# Altium PCB balance.PcbDoc
Units mm, origin at the board's own origin, x right, y up, seen from the top; angles counter-clockwise.
Board outline 25.91 x 66.29 mm, 2 copper layers (Top Layer, Bottom Layer); 61 components, 31 nets, 187 pads, 57 vias.
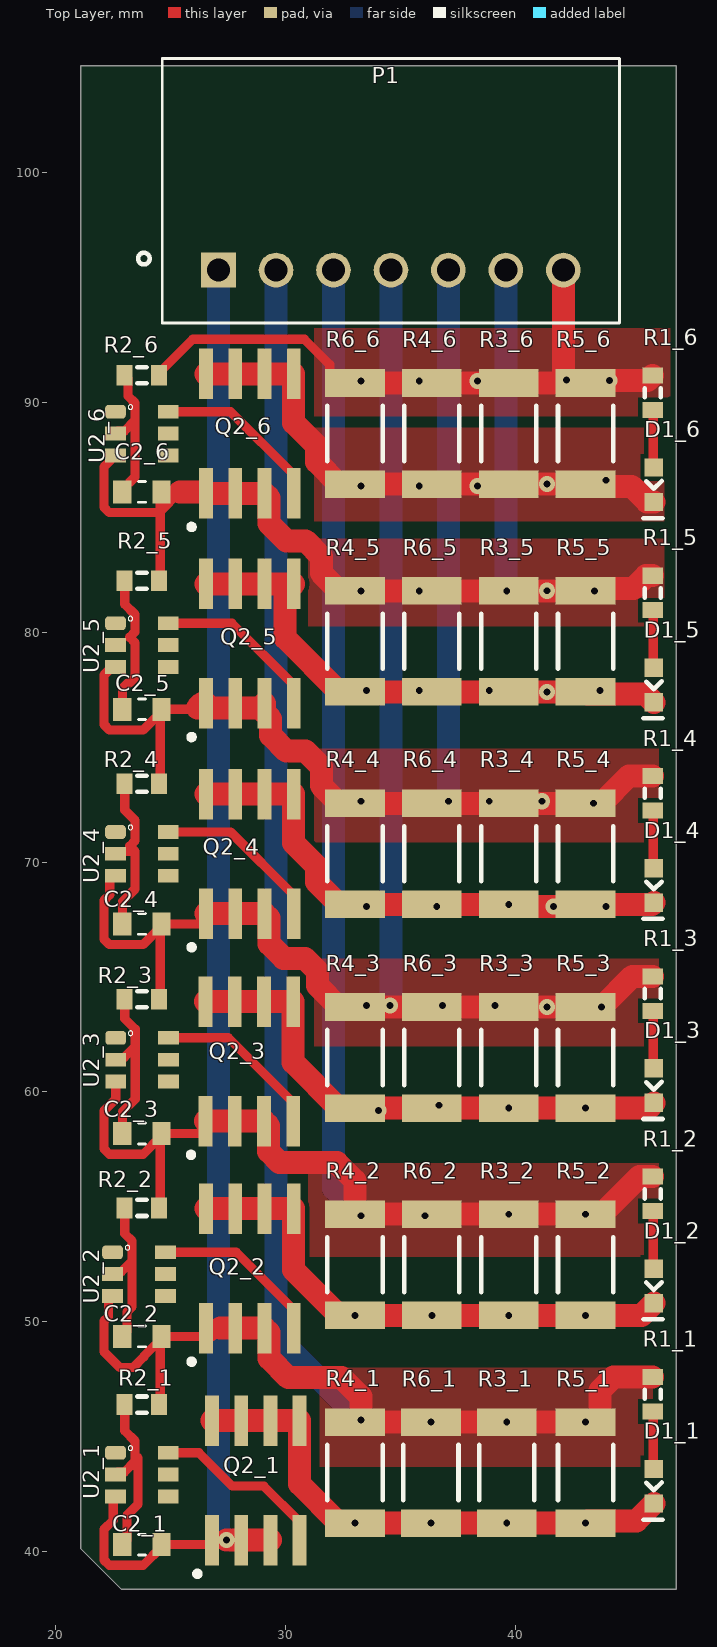
[diagram p0: Top Layer view]
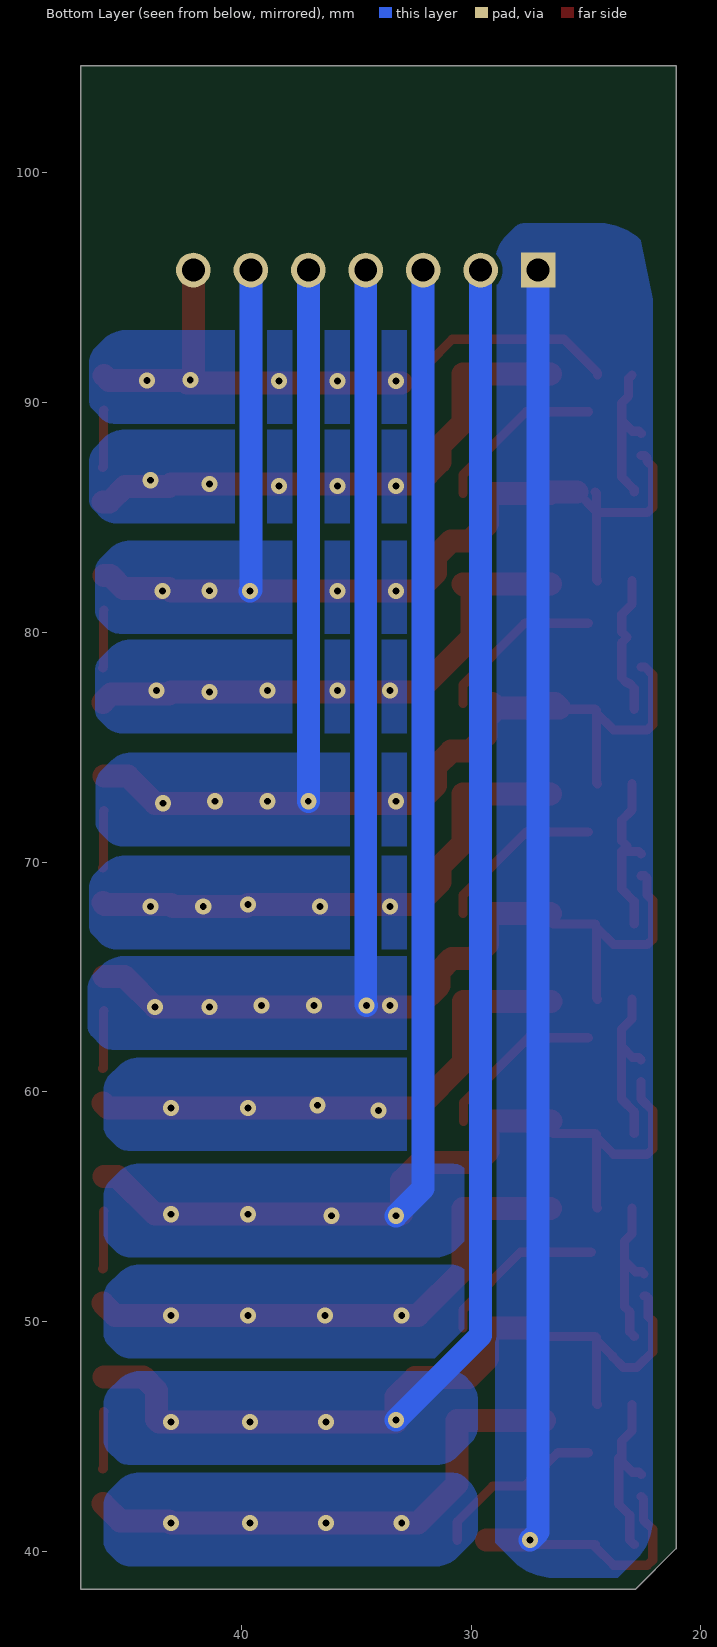
[diagram p1: Bottom Layer view, seen from below]

## Layer stack, top to bottom
Top Solder: solder mask 0.0102, Solder Resist, Dk 3.5
Top Layer: signal copper 0.0356
Dielectric 1: dielectric 0.32, FR-4, Dk 4.8
Bottom Layer: signal copper 0.0356
Bottom Solder: solder mask 0.0102, Solder Resist, Dk 3.5

## Board outline
21.082,40.132 21.082,104.648 46.99,104.648 46.99,38.354 22.86,38.354

## Design rules (kind name [scope] priority, off if disabled: settings)
Clearance [All] p1: gap=0.2 ignorepadtopadclearanceinfootprint=FALSE except(0: Arc-Hole Track-Hole SMDPad-Hole THPad-Hole Via-Hole Fill-Hole Poly-Hole Region-Hole Text-Hole)
ComponentClearance [All] p1: gap=0.254 collisioncheckmode=3 verticalgap=2540 showdistances=FALSE
FanoutControl Fanout_SOIC [IsSOIC] p3: bgadir=Out bgaviamode=Closest fanoutstyle=Auto fanoutdirection=Alternating viagrid=0.025 // Fanout_SOIC (Default Rule)
FanoutControl Fanout_Small [(CompPinCount < 5)] p4: bgadir=Out bgaviamode=Closest fanoutstyle=Auto fanoutdirection=OutThenIn viagrid=0.025 // Fanout_Small (Default Rule)
FanoutControl Fanout_Default [All] p5: bgadir=In bgaviamode=Closest fanoutstyle=Auto fanoutdirection=Alternating viagrid=0.025 // Fanout_Default (Default Rule)
HoleSize [All] p1: absolutevalues=TRUE maxlimit=4.5 minlimit=0.3 maxpercent=80.000 minpercent=20.000
HoleToHoleClearance [All] p1: gap=0.4 allowstackedmicrovias=TRUE
MinimumSolderMaskSliver [All] p1: minsoldermaskwidth=0.2
PlaneClearance [All] p1: clearance=0.2
PlaneConnect [All] p1: planeconnectstyle=Direct reliefexpansion=0.5 reliefentries=4 reliefconductorwidth=0.25 reliefairgap=0.25
PolygonConnect [All] p1: connectstyle=Direct reliefconductorwidth=0.3 reliefentries=4 polygonreliefangle="90 Angle" airgapwidth=0.254
RoomDefinition 1 [InComponentClass('1')] p1: confinementstyle=ConfineIn formatcopy=TRUE lockcomponents=FALSE outline 21.336,38.608 47.498,38.608 47.498,48.514 21.336,48.514
RoomDefinition 6 [InComponentClass('6')] p2: confinementstyle=ConfineIn formatcopy=TRUE lockcomponents=FALSE outline 21.17,84.074 47.078,84.074 47.078,92.71 21.17,92.71
RoomDefinition 3 [InComponentClass('3')] p3: confinementstyle=ConfineIn formatcopy=TRUE lockcomponents=FALSE outline 21.313,56.752 46.967,56.752 46.967,65.81 21.313,65.81
RoomDefinition 5 [InComponentClass('5')] p4: confinementstyle=ConfineIn formatcopy=TRUE lockcomponents=FALSE outline 21.209,74.93 47.117,74.93 47.117,84.014 21.209,84.014
RoomDefinition 4 [InComponentClass('4')] p5: confinementstyle=ConfineIn formatcopy=TRUE lockcomponents=FALSE outline 21.336,65.786 46.99,65.786 46.99,74.93 21.336,74.93
RoomDefinition 2 [InComponentClass('2')] p6: confinementstyle=ConfineIn formatcopy=TRUE lockcomponents=FALSE outline 21.336,47.752 47.498,47.752 47.498,56.896 21.336,56.896
RoutingCorners [All] p1: cornerstyle=45-Degree minsetback=2.5 maxsetback=2.5
RoutingPriority [All] p1 off: routingpriority=0
RoutingVias [All] p1: holewidth=0.3 width=0.7 viastyle="Through Hole" minholewidth=0.3 minwidth=0.7 maxholewidth=0.8 maxwidth=1.2
SilkToSilkClearance [All] p1: silktosilkclearance=0.2
SilkToSolderMaskClearance SilkscreenOverComponentPads [IsPad] p1: minsilkscreentomaskgap=0.2 clearancetoexposedcopper=TRUE
SolderMaskExpansion [All] p1: expansion=0.1 istentingtop=FALSE
Width [All] p1: maxlimit=5 minlimit=0.15 preferedwidth=0.3 minimp=50.000000 maximp=50.000000 favimp=50.000000
17 further rules are at their usual default settings.

## Classes and differential pairs
channel class 1s: 1 2 3 4 5 6
component class 6: C2_6 D1_6 Q2_6 R1_6 R2_6 R3_6 R4_6 R5_6 R6_6 U2_6
component class 5: C2_5 D1_5 Q2_5 R1_5 R2_5 R3_5 R4_5 R5_5 R6_5 U2_5
component class 4: C2_4 D1_4 Q2_4 R1_4 R2_4 R3_4 R4_4 R5_4 R6_4 U2_4
component class 3: C2_3 D1_3 Q2_3 R1_3 R2_3 R3_3 R4_3 R5_3 R6_3 U2_3
component class 2: C2_2 D1_2 Q2_2 R1_2 R2_2 R3_2 R4_2 R5_2 R6_2 U2_2
component class 1: C2_1 D1_1 Q2_1 R1_1 R2_1 R3_1 R4_1 R5_1 R6_1 U2_1
component class Sheet2: P1

## Components (designator, comment, footprint, x,y, rotation, side; value= is the part's Value field where it differs from the comment)
C2_1 "GX035C104MAT2-500" *CAPC1608X90 23.749,40.3 r0 top value=0.1u (schematic designator C2)
C2_2 "GX035C104MAT2-500" *CAPC1608X90 23.749,49.362 r0 top value=0.1u (schematic designator C2)
C2_3 "GX035C104MAT2-500" *CAPC1608X90 23.749,58.19 r0 top value=0.1u (schematic designator C2)
C2_4 "GX035C104MAT2-500" *CAPC1608X90 23.749,67.31 r0 top value=0.1u (schematic designator C2)
C2_5 "GX035C104MAT2-500" *CAPC1608X90 23.749,76.648 r0 top value=0.1u (schematic designator C2)
C2_6 "GX035C104MAT2-500" *CAPC1608X90 23.749,86.106 r0 top value=0.1u (schematic designator C2)
D1_1 "0603-LED-BLUE" *LEDM1608X80_LTE-C1906R-14(Primary) 46.024,42.84 r90 top (schematic designator D1)
D1_2 "0603-LED-BLUE" *LEDM1608X80_LTE-C1906R-14(Primary) 46.024,51.555 r90 top (schematic designator D1)
D1_3 "0603-LED-BLUE" *LEDM1608X80_LTE-C1906R-14(Primary) 46.024,60.271 r90 top (schematic designator D1)
D1_4 "0603-LED-BLUE" *LEDM1608X80_LTE-C1906R-14(Primary) 46.024,68.986 r90 top (schematic designator D1)
D1_5 "0603-LED-BLUE" *LEDM1608X80_LTE-C1906R-14(Primary) 46.024,77.701 r90 top (schematic designator D1)
D1_6 "0603-LED-BLUE" *LEDM1608X80_LTE-C1906R-14(Primary) 46.024,86.416 r90 top (schematic designator D1)
P1 "S7B-XH-A(LF)(SN)" *JST_S7B-XH-A(LF)(SN) 30.834,95.758 r0 top
Q2_1 "IRF7862" *SO-08 28.702,43.094 r0 top (schematic designator Q2)
Q2_2 "IRF7862" *SO-08 28.448,52.324 r0 top (schematic designator Q2)
Q2_3 "IRF7862" *SO-08 28.425,61.324 r0 top (schematic designator Q2)
Q2_4 "IRF7862" *SO-08 28.448,70.358 r0 top (schematic designator Q2)
Q2_5 "IRF7862" *SO-08 28.448,79.502 r0 top (schematic designator Q2)
Q2_6 "IRF7862" *SO-08 28.448,88.646 r0 top (schematic designator Q2)
R1_1 "Res3" J1-0603 45.974,46.848 r270 top value=330 (schematic designator R1)
R1_2 "Res3" J1-0603 45.974,55.563 r270 top value=330 (schematic designator R1)
R1_3 "Res3" J1-0603 45.974,64.278 r270 top value=330 (schematic designator R1)
R1_4 "Res3" J1-0603 45.974,72.993 r270 top value=330 (schematic designator R1)
R1_5 "Res3" J1-0603 45.974,81.709 r270 top value=330 (schematic designator R1)
R1_6 "Res3" J1-0603 45.974,90.424 r270 top value=330 (schematic designator R1)
R2_1 "Res3" J1-0603 23.749,46.396 r0 top value=100 (schematic designator R2)
R2_2 "Res3" J1-0603 23.749,54.95 r0 top value=100 (schematic designator R2)
R2_3 "Res3" J1-0603 23.749,64.032 r0 top value=100 (schematic designator R2)
R2_4 "Res3" J1-0603 23.749,73.406 r0 top value=100 (schematic designator R2)
R2_5 "Res3" J1-0603 23.749,82.236 r0 top value=100 (schematic designator R2)
R2_6 "Res3" J1-0603 23.749,91.186 r0 top value=100 (schematic designator R2)
R3_1 "Res3" 12Z-2010 39.624,43.434 r90 top value=33 (schematic designator R3)
R3_2 "Res3" 12Z-2010 39.709,52.476 r90 top value=33 (schematic designator R3)
R3_3 "Res3" 12Z-2010 39.709,61.492 r90 top value=33 (schematic designator R3)
R3_4 "Res3" 12Z-2010 39.709,70.358 r90 top value=33 (schematic designator R3)
R3_5 "Res3" 12Z-2010 39.709,79.604 r90 top value=33 (schematic designator R3)
R3_6 "Res3" 12Z-2010 39.709,88.646 r90 top value=33 (schematic designator R3)
R4_1 "Res3" 12Z-2010 33.02,43.434 r90 top value=33 (schematic designator R4)
R4_2 "Res3" 12Z-2010 33.02,52.476 r90 top value=33 (schematic designator R4)
R4_3 "Res3" 12Z-2010 33.02,61.492 r90 top value=33 (schematic designator R4)
R4_4 "Res3" 12Z-2010 33.02,70.358 r90 top value=33 (schematic designator R4)
R4_5 "Res3" 12Z-2010 33.02,79.604 r90 top value=33 (schematic designator R4)
R4_6 "Res3" 12Z-2010 36.364,88.646 r90 top value=33 (schematic designator R4)
R5_1 "Res3" 12Z-2010 43.053,43.434 r90 top value=33 (schematic designator R5)
R5_2 "Res3" 12Z-2010 43.053,52.476 r90 top value=33 (schematic designator R5)
R5_3 "Res3" 12Z-2010 43.053,61.492 r90 top value=33 (schematic designator R5)
R5_4 "Res3" 12Z-2010 43.053,70.358 r90 top value=33 (schematic designator R5)
R5_5 "Res3" 12Z-2010 43.053,79.604 r90 top value=33 (schematic designator R5)
R5_6 "Res3" 12Z-2010 43.053,88.646 r90 top value=33 (schematic designator R5)
R6_1 "Res3" 12Z-2010 36.322,43.434 r90 top value=33 (schematic designator R6)
R6_2 "Res3" 12Z-2010 36.364,52.476 r90 top value=33 (schematic designator R6)
R6_3 "Res3" 12Z-2010 36.364,61.492 r90 top value=33 (schematic designator R6)
R6_4 "Res3" 12Z-2010 36.364,70.358 r90 top value=33 (schematic designator R6)
R6_5 "Res3" 12Z-2010 36.364,79.604 r90 top value=33 (schematic designator R6)
R6_6 "Res3" 12Z-2010 33.02,88.646 r90 top value=33 (schematic designator R6)
U2_1 "HY2213-BB3A" sot23-6 23.749,43.348 r270 top (schematic designator U2)
U2_2 "HY2213-BB3A" sot23-6 23.622,52.07 r270 top (schematic designator U2)
U2_3 "HY2213-BB3A" sot23-6 23.756,61.402 r270 top (schematic designator U2)
U2_4 "HY2213-BB3A" sot23-6 23.749,70.358 r270 top (schematic designator U2)
U2_5 "HY2213-BB3A" sot23-6 23.749,79.442 r270 top (schematic designator U2)
U2_6 "HY2213-BB3A" sot23-6 23.749,88.646 r270 top (schematic designator U2)

## Footprints (in the part's own frame and the unit in brackets; to place one, negate y for a bottom-side part, rotate by r counter-clockwise, add the part's x,y. Pads: shape width x height; smd on the part's side, far side on the other; paste and mask are expansions set on the pad)
12Z-2010 [mm] "Chip Resistor, Body 5.0x2.5mm, IPC High Density"
  rect 1.2x2.6 smd: 1(-2.2,0) 2(2.2,0)
  silkscreen extent -1.2,-1.2 1.2,1.2, body extent -2.58,-1.33 2.58,1.33, height 0.9
*CAPC1608X90 [mm]
  rect 0.8x1 smd: 1(-0.85,0) 2(0.85,0)
  silkscreen extent -0.15,-0.45 0.15,0.45, body extent -0.8,-0.4 0.8,0.41, height 0.88
*JST_S7B-XH-A(LF)(SN) [mm]
  rect 1.508x1.508 hole 1: 1(-3.75,0)
  round 1.508 hole 1: 2(-1.25,0) 3(1.25,0) 4(3.75,0) 5(6.25,0) 6(8.75,0) 7(11.25,0)
  silkscreen extent -7.25,-2.3 13.7,9.2, body extent -6.15,-2.3 13.75,9.2, height 6.15
*LEDM1608X80_LTE-C1906R-14(Primary) [mm]
  rect 0.8x0.8 smd: A(0.75,0) C(-0.75,0)
  silkscreen extent -1.45,-0.38 0.16,0.45, body extent -0.8,-0.3 0.8,0.3, height 1.15
*SO-08 [mm]
  rect 0.6x2.2 smd: D(-1.905,2.6) D(-0.635,2.6) D(0.635,2.6) D(1.905,2.6) G(1.905,-2.6) S(-1.905,-2.6) S(-0.635,-2.6) S(0.635,-2.6)
  silkscreen extent -2.64,-4.16 -2.44,-3.96, body extent -2.45,-3 2.45,3, height 1.73
J1-0603 [mm] "Chip Resistor, Body 1.6x0.8mm, IPC High Density"
  rect 0.7x0.9 smd: 1(-0.75,0) 2(0.75,0)
  silkscreen extent -0.2,-0.35 0.2,0.35, body extent -0.85,-0.48 0.85,0.48, height 0.9
sot23-6 [mm]
  rrect50% 0.6x0.9 smd: 1(-0.95,-1.15)
  rect 0.6x0.9 smd: 2(0,-1.15) 3(0.95,-1.15) 4(0.95,1.15) 5(0,1.15) 6(-0.95,1.15)
  silkscreen extent -1.25,-0.6 -1.05,-0.4, body extent -1.45,-1.4 1.45,1.4, height 1.44

## Part data
C2_1 C2_2 C2_3 C2_4 C2_5 C2_6: "Cap Thin Film 0.1uf 50v 0603", Package="0603 AVX", MF=AVX, MP="GX035C104MAT2-500 or CL10B104JB8NNNC", Pacage Metric=1608, SnapEDA_Link=https://www.snapeda.com/parts/GX035C104MAT2-500/AVX/view-part/?ref=snap, Type=SMD
D1_1 D1_2 D1_3 D1_4 D1_5 D1_6: library part LTE-C1906R-14, "LED IrLED Chip LED 2-Pin SMD T/R", Package="0603 Lite-On", MP=0603-LED-BLUE, SnapEDA_Link=https://www.snapeda.com/parts/LTE-C1906R-14/Lite-On%20Inc./view-part/?ref=snap, Type=SMD
P1: "XH Series 7 Position 2.5 mm Through Hole Right Angle Press Fit Shrouded Header", Package=None, Availability=Unavailable, MF="JST Sales", MP=S4B-XH-A_LF__SN_, Price=None, SnapEDA_Link=https://www.snapeda.com/parts/S4B-XH-A%28LF%29%28SN%29/JST%20Sales%20America%20Inc./view-part/?ref=snap
Q2_1 Q2_2 Q2_3 Q2_4 Q2_5 Q2_6: "N-Channel MOSFET", LatestRevisionDate=17-Jul-2002, LatestRevisionNote="Re-released for DXP Platform.", PackageDescription="TO, Flat Index; 3 In-Line, Axial Leads; Body Dia. 4.6mm; Lead Dia. 0.5 mm (max)", PackageReference=E3, PackageVersion=1995/1996, Published=8-Jun-2000, Publisher="Altium Limited"
R1_1 R1_2 R1_3 R1_4 R1_5 R1_6: "Resistor", Package=R0603, ChipDip_Link=https://www.chipdip.ru/product0/9000079628, HelpURL=https://www.chipdip.ru/product0/9000079628, MP=RC0603FR-07330RL, Pacage Metric=1608, Type=SMD
R2_1 R2_2 R2_3 R2_4 R2_5 R2_6 R3_1 R3_2 R3_3 R3_4 R3_5 R3_6 R4_1 R4_2 R4_3 R4_4 R4_5 R4_6 R5_1 R5_2 R5_3 R5_4 R5_5 R5_6 R6_1 R6_2 R6_3 R6_4 R6_5 R6_6: "Resistor", LatestRevisionDate=29-May-2009, LatestRevisionNote="IPC-7351 Footprint Added.", PackageDescription="Chip Resistor", PackageReference=J1-0603, Published=8-Jun-2000, Publisher="Altium Limited"
U2_1 U2_2 U2_3 U2_4 U2_5 U2_6: Package=SOT-23-6, Availability=Unavailable, ChipDip_Link=http://www.hycontek.com/wp-content/uploads/DS-HY2213_EN.pdf, HelpURL=http://www.hycontek.com/wp-content/uploads/DS-HY2213_EN.pdf, MF=infineon, MP=IRS10752LTRPBF, Price=None, SnapEDA_Link=https://www.snapeda.com/parts/IRS10752LTRPBF/Infineon%20Technologies/view-part/?ref=search&t=IRS10752

## Via types
v1: diameter 0.7, hole 0.3, Top Layer to Bottom Layer, tented both sides, 57 vias

## Nets (pads, with @x,y where several pads share a name; then routed paths per layer and width w, separated by ;. In a path a pad name is that pad's centre, name@x,y a point inside that pad or via, vN(x,y) a via of type N, cw(c..) or ccw(c..) an arc to the next point about the centre after c; other vN are vias at no path point)
GND: C2_1.2 P1.1 Q2_1.S U2_1.3 | length 66.2
  Top Layer w0.4: U2_1.3 22.499,42.298 22.499,41.366 22.099,40.966 22.099,39.634 22.333,39.4 23.799,39.4 24.599,40.2 C2_1.2 27.157,40.3 27.351,40.494 v1(27.432,40.494)
  Top Layer w1: v1(27.432,40.494) 28.067,40.494 Q2_1.S@29.337,40.494
  Bottom Layer w1: P1.1 27.084,40.842 v1(27.432,40.494)
NetC2_1_1: C2_1.1 R2_1.1 U2_1.2 | length 8
  Top Layer w0.4: U2_1.2 22.699,43.448 22.977,43.448 23.449,43.92 23.449,44.196 ; C2_1.1 23.099,40.5 23.099,41.582 23.577,42.06 23.577,44.068 23.449,44.196 ; R2_1.1 22.999,45.258 23.449,44.808 23.449,44.196
NetC2_2_1: C2_2.1 R2_2.1 U2_2.2 | length 7
  Top Layer w0.4: U2_2.2 22.572,52.17 22.85,52.17 23.322,52.642 ; C2_2.1 23.099,49.562 23.099,50.431 23.322,50.654 23.322,52.642 ; R2_2.1 22.999,53.833 23.322,53.509 23.322,52.642
NetC2_3_1: C2_3.1 R2_3.1 U2_3.2 | length 7.3
  Top Layer w0.4: U2_3.2 22.706,61.502 22.984,61.502 23.456,61.974 ; C2_3.1 22.899,59.134 23.456,59.691 23.456,61.974 ; R2_3.1 22.999,63.187 23.456,62.73 23.456,61.974
NetC2_4_1: C2_4.1 R2_4.1 U2_4.2 | length 7.6
  Top Layer w0.4: U2_4.2 22.699,70.458 23.449,70.458 ; C2_4.1 22.899,68.278 23.449,68.828 23.449,70.458 ; R2_4.1 22.999,72.268 23.449,71.818 23.449,70.93 23.213,70.694 23.449,70.458
NetC2_5_1: C2_5.1 R2_5.1 U2_5.2 | length 6.2
  Top Layer w0.4: C2_5.1 22.899,77.558 23.133,77.792 23.215,77.792 23.449,78.026 23.449,79.542 23.213,79.778 23.449,80.014 23.449,80.77 22.999,81.22 R2_5.1
NetC2_6_1: C2_6.1 R2_6.1 U2_6.2 | length 6.6
  Top Layer w0.4: U2_6.2 22.699,88.746 22.977,88.746 23.449,89.218 ; C2_6.1 22.899,86.206 23.449,86.756 23.449,89.218 ; R2_6.1 23.149,91.036 23.149,90.274 23.449,89.974 23.449,89.218
NetD1_1_A: D1_1.A R1_1.2 | length 2.5
  Top Layer w0.4: R1_1.2 45.999,46.073 45.999,43.615 D1_1.A
NetD1_1_C: D1_1.C Q2_1.D R3_1.1 R4_1.1 R5_1.1 R6_1.1 | length 23
  Top Layer w1: Q2_1.D@26.797,45.694 28.067,45.694 29.337,45.694 30.607,45.694 30.607,42.947 32.32,41.234 v1(33.02,41.234) v1(36.322,41.234) v1(39.624,41.234) v1(43.053,41.234) 43.153,41.334 45.268,41.334 D1_1.C
NetD1_2_A: D1_2.A R1_2.2 | length 2.5
  Top Layer w0.4: R1_2.2 45.999,54.788 45.999,52.33 D1_2.A
NetD1_2_C: D1_2.C Q2_2.D R3_2.1 R4_2.1 R5_2.1 R6_2.1 | length 23.2
  Top Layer w1: Q2_2.D@26.543,54.924 27.813,54.924 29.083,54.924 30.353,54.924 30.353,52.243 32.32,50.276 v1(33.02,50.276) v1(36.364,50.276) v1(39.709,50.276) v1(43.053,50.276) 45.495,50.276 D1_2.C
NetD1_3_A: D1_3.A R1_3.2 | length 2.5
  Top Layer w0.4: R1_3.2 45.999,63.503 45.999,61.046 D1_3.A
NetD1_3_C: D1_3.C Q2_3.D R3_3.1 R4_3.1 R5_3.1 R6_3.1 | length 23.1
  Top Layer w1: Q2_3.D@26.52,63.924 27.79,63.924 29.06,63.924 30.33,63.924 30.33,61.282 32.32,59.292 R4_3.1 R6_3.1 v1(39.709,59.292) v1(43.053,59.292) 45.795,59.292 D1_3.C
  other v1: 34.036,59.182 36.68,59.419
NetD1_4_A: D1_4.A R1_4.2 | length 2.5
  Top Layer w0.4: R1_4.2 45.999,72.218 45.999,69.761 D1_4.A
NetD1_4_C: D1_4.C Q2_4.D R3_4.1 R4_4.1 R5_4.1 R6_4.1 | length 23.2
  Top Layer w1: Q2_4.D@26.543,72.958 27.813,72.958 29.083,72.958 30.353,72.958 30.353,70.825 31.353,69.825 31.353,69.125 32.32,68.158 R4_4.1 33.528,68.158 R6_4.1 36.576,68.158 v1(39.709,68.158) 39.795,68.072 42.967,68.072 R5_4.1 43.942,68.158 45.946,68.158 D1_4.C
  other v1: 33.528,68.072 36.576,68.072 41.656,68.072 43.942,68.072
NetD1_5_A: D1_5.A R1_5.2 | length 2.5
  Top Layer w0.4: R1_5.2 45.999,80.934 45.999,78.476 D1_5.A
NetD1_5_C: D1_5.C Q2_5.D R3_5.1 R4_5.1 R5_5.1 R6_5.1 | length 23.7
  Top Layer w1: Q2_5.D@26.543,82.102 27.813,82.102 29.083,82.102 30.353,82.102 30.293,82.042 29.972,82.042 29.972,79.752 32.32,77.404 R4_5.1 R6_5.1 R3_5.1 R5_5.1 43.153,77.304 45.671,77.304 D1_5.C
  other v1: 41.381,77.404 33.528,77.47 35.814,77.47 38.862,77.47 43.688,77.47
NetD1_6_A: D1_6.A R1_6.2 | length 2.5
  Top Layer w0.4: R1_6.2 45.999,89.649 45.999,87.191 D1_6.A
NetD1_6_C: D1_6.C Q2_6.D R3_6.1 R4_6.1 R5_6.1 R6_6.1 | length 23.5
  Top Layer w1: Q2_6.D@26.543,91.246 27.813,91.246 29.083,91.246 30.353,91.246 30.353,89.113 31.353,88.113 31.353,87.413 32.32,86.446 R6_6.1 R4_6.1 R3_6.1 R5_6.1 43.153,86.346 45.054,86.346 45.734,85.666 D1_6.C
  other v1: 33.274,86.36 35.814,86.36 38.354,86.36 41.381,86.446 43.942,86.614
NetQ2_1_G: Q2_1.G U2_1.6 | length 7.8
  Top Layer w0.4: U2_1.6 26.227,44.298 27.679,42.846 29.055,42.846 30.607,41.294 Q2_1.G
NetQ2_2_G: Q2_2.G U2_2.6 | length 7.4
  Top Layer w0.4: U2_2.6 27.857,53.02 30.353,50.524 Q2_2.G
NetQ2_3_G: Q2_3.G U2_3.6 | length 7.4
  Top Layer w0.4: U2_3.6 27.502,62.352 30.33,59.524 Q2_3.G
NetQ2_4_G: Q2_4.G U2_4.6 | length 7.4
  Top Layer w0.4: U2_4.6 27.603,71.308 30.353,68.558 Q2_4.G
NetQ2_5_G: Q2_5.G U2_5.6 | length 7.4
  Top Layer w0.4: U2_5.6 27.663,80.392 30.353,77.702 Q2_5.G
NetQ2_6_G: Q2_6.G U2_6.6 | length 7.4
  Top Layer w0.4: U2_6.6 27.603,89.596 30.353,86.846 Q2_6.G
S1: C2_2.2 P1.2 Q2_2.S R1_1.1 R2_1.2 R3_1.2 R4_1.2 R5_1.2 R6_1.2 U2_2.3 | length 86.4
  Top Layer w0.4: U2_2.3 22.391,51.12 22.291,51.02 22.291,50.22 22.099,50.028 22.099,48.696 22.789,48.006 23.368,48.006 23.833,48.471 23.833,48.496 C2_2.2@24.549,49.212 ; R2_1.2 24.549,46.446 C2_2.2@24.549,49.212 ; 27.178,49.724 26.816,49.362 C2_2.2 24.549,49.312 C2_2.2@24.549,49.212
  Top Layer w1: 27.178,49.724 27.813,49.724 29.083,49.724 29.283,49.524 29.283,48.404 30.117,47.57 32.44,47.57 33.274,46.736 R4_1.2@33.274,45.734 ; R4_1.2@33.274,45.634 v1(36.322,45.634) v1(39.624,45.634) v1(43.053,45.634) 43.588,45.634 43.688,45.734 43.688,47.012 44.274,47.598 R1_1.1
  Bottom Layer w1: P1.2 29.584,49.41 v1(33.274,45.72)
S2: C2_3.2 P1.3 Q2_3.S R1_2.1 R2_2.2 R3_2.2 R4_2.2 R5_2.2 R6_2.2 U2_3.3 | length 76.4
  Top Layer w0.4: U2_3.3 22.606,59.69 22.099,59.183 22.099,57.524 22.333,57.29 23.799,57.29 C2_3.2@24.549,58.04 ; R2_2.2 24.549,55 C2_3.2@24.549,58.04 ; Q2_3.S@26.52,58.724 26.52,58.29 26.42,58.19 C2_3.2 24.549,58.14 C2_3.2@24.549,58.04
  Top Layer w1: Q2_3.S@26.52,58.724 27.79,58.724 29.06,58.724 29.26,58.524 29.26,57.404 29.74,56.924 32.23,56.924 33.02,56.134 R4_2.2 ; R4_2.2@33.274,54.676 R6_2.2 v1(39.709,54.676) v1(43.053,54.676) 43.753,54.676 45.389,56.313 R1_2.1
  Bottom Layer w1: P1.3 32.084,55.8 v1(33.274,54.61)
  other v1: 36.068,54.61
S3: C2_4.2 P1.4 Q2_4.S R1_3.1 R2_3.2 R3_3.2 R4_3.2 R5_3.2 R6_3.2 U2_4.3 | length 66.3
  Top Layer w0.4: U2_4.3 22.449,69.408 22.349,69.308 22.349,68.577 22.099,68.327 22.099,66.644 22.333,66.41 23.799,66.41 C2_4.2@24.549,67.16 ; R2_3.2 24.549,64.082 C2_4.2@24.549,67.16 ; Q2_4.S@26.543,67.758 26.543,67.41 26.443,67.31 C2_4.2 24.599,67.21 C2_4.2@24.549,67.16
  Top Layer w1: Q2_4.S@26.543,67.758 27.813,67.758 29.083,67.758 29.283,67.558 29.283,66.438 29.912,65.809 30.834,65.809 31.393,65.251 31.393,64.619 32.32,63.692 R4_3.2 R6_3.2 R3_3.2 R5_3.2 v1(43.753,63.692) 45.089,65.028 R1_3.1
  Bottom Layer w1: v1(34.544,63.754) 34.584,63.794 P1.4
  other v1: 41.381,63.692 33.528,63.754 36.83,63.754 39.116,63.754
S4: C2_5.2 P1.5 Q2_5.S R1_4.1 R2_4.2 R3_4.2 R4_4.2 R5_4.2 R6_4.2 U2_5.3 | length 58
  Top Layer w0.4: U2_5.3 22.449,78.492 22.099,78.142 22.099,75.982 22.333,75.748 23.799,75.748 C2_5.2@24.549,76.498 ; R2_4.2 24.549,73.456 C2_5.2@24.549,76.498 ; Q2_5.S@26.543,76.902 26.543,76.748 26.503,76.708 26.443,76.648 C2_5.2 24.549,76.598 C2_5.2@24.549,76.498
  Top Layer w1: Q2_5.S@26.543,76.902 26.356,76.902 26.162,76.708 26.503,76.708 28.889,76.708 29.083,76.902 29.083,76.502 29.353,76.232 29.353,75.512 30.035,74.83 30.871,74.83 31.553,74.148 31.553,73.325 32.32,72.558 R4_4.2 R6_4.2 R3_4.2 R5_4.2 43.753,72.558 44.938,73.743 R1_4.1
  Bottom Layer w1: v1(37.084,72.644) P1.5
  other v1: 43.403,72.558 33.274,72.644 38.862,72.644 41.148,72.644
S5: C2_6.2 P1.6 Q2_6.S R1_5.1 R2_5.2 R3_5.2 R4_5.2 R5_5.2 R6_5.2 U2_6.3 | length 47.8
  Top Layer w0.4: U2_6.3 22.449,87.696 22.349,87.596 22.349,87.446 22.099,87.196 22.099,85.44 22.333,85.206 24.5,85.206 24.549,85.255 ; R2_5.2 24.549,82.286 24.549,85.255 ; C2_6.2 24.549,86.056 24.549,85.255 ; 25.4,86.106 24.549,85.255
  Top Layer w1: 25.4,86.106 26.483,86.106 26.543,86.046 27.813,86.046 29.083,86.046 29.283,85.846 29.283,84.726 30.035,83.974 30.871,83.974 31.553,83.292 31.553,82.571 32.32,81.804 R4_5.2 R6_5.2 R3_5.2@39.624,81.804 ; R3_5.2 R5_5.2 43.153,81.904 45.129,81.904 45.684,82.459 R1_5.1
  Bottom Layer w1: P1.6 39.584,81.828 v1(39.624,81.788)
  other v1: 33.274,81.788 35.814,81.788 43.434,81.788 41.381,81.804
S6: P1.7 R1_6.1 R2_6.2 R3_6.2 R4_6.2 R5_6.2 R6_6.2 | length 28.4
  Top Layer w0.4: R2_6.2 24.499,91.286 25.959,92.746 30.819,92.746 31.92,91.645 31.92,91.246 32.32,90.846 R6_6.2
  Top Layer w1: R6_6.2 R4_6.2 R3_6.2 R5_6.2@42.353,90.846 ; P1.7 42.084,91.115 R5_6.2@42.353,90.846 ; R1_6.1 45.746,90.946 42.453,90.946 R5_6.2@42.353,90.846
  other v1: 33.274,90.932 35.814,90.932 38.354,90.932 44.1,90.946 42.218,90.98
pads on no net: U2_1.1 U2_1.4 U2_1.5 U2_2.1 U2_2.4 U2_2.5 U2_3.1 U2_3.4 U2_3.5 U2_4.1 U2_4.4 U2_4.5 U2_5.1 U2_5.4 U2_5.5 U2_6.1 U2_6.4 U2_6.5

## Polygon pours and split planes (outlines as drawn)
GND on Bottom Layer "NONET_L-01_P-001" (solid, remove dead copper, pour order 12): 27.686,97.79 24.42,97.79 ccw(c24.42,95.25) 22.624,97.046 22.098,94.488 22.098,41.438 ccw(c24.638,41.438) 22.842,39.642 23.622,38.862 26.38,38.862 ccw(c26.38,41.402) 28.176,39.606 28.956,40.386 28.956,96.056 ccw(c27.222,96.056) 28.448,97.282 28.12,97.61 ccw(c27.686,97.177)
S6 on Bottom Layer "NONET_L-01_P-001" (solid, remove dead copper, pour order 11): 45.085,93.132 cw(c45.085,91.906) 45.952,92.773 46.355,92.37 cw(c45.742,91.757) 46.609,91.757 46.609,90.084 cw(c45.996,90.084) 46.429,89.65 46.101,89.322 cw(c45.488,89.935) 45.488,89.068 32.131,89.068 cw(c32.131,90.294) 31.264,89.427 30.607,90.084 cw(c31.22,90.697) 30.353,90.697 30.353,91.862 cw(c31.579,91.862) 30.712,92.729 30.861,92.878 cw(c31.474,92.265) 31.474,93.132
NetD1_6_C on Bottom Layer "NONET_L-01_P-001" (solid, remove dead copper, pour order 10): 45.085,88.814 cw(c45.085,87.588) 45.952,88.455 46.355,88.052 cw(c45.742,87.439) 46.609,87.439 46.609,85.766 cw(c45.996,85.766) 46.429,85.332 46.101,85.004 cw(c45.488,85.617) 45.488,84.75 32.131,84.75 cw(c32.131,85.976) 31.264,85.109 30.607,85.766 cw(c31.22,86.379) 30.353,86.379 30.353,87.544 cw(c31.579,87.544) 30.712,88.411 30.861,88.56 cw(c31.474,87.947) 31.474,88.814
S5 on Bottom Layer "NONET_L-01_P-001" (solid, remove dead copper, pour order 9): 44.831,83.988 cw(c44.831,82.762) 45.698,83.629 46.101,83.226 cw(c45.488,82.613) 46.355,82.613 46.355,80.94 cw(c45.742,80.94) 46.175,80.506 45.847,80.178 cw(c45.234,80.791) 45.234,79.924 31.877,79.924 cw(c31.877,81.15) 31.01,80.283 30.353,80.94 cw(c30.966,81.553) 30.099,81.553 30.099,82.718 cw(c31.325,82.718) 30.458,83.585 30.607,83.734 cw(c31.22,83.121) 31.22,83.988
NetD1_5_C on Bottom Layer "NONET_L-01_P-001" (solid, remove dead copper, pour order 8): 44.831,79.67 cw(c44.831,78.444) 45.698,79.311 46.101,78.908 cw(c45.488,78.295) 46.355,78.295 46.355,76.622 cw(c45.742,76.622) 46.175,76.188 45.847,75.86 cw(c45.234,76.473) 45.234,75.606 31.877,75.606 cw(c31.877,76.832) 31.01,75.965 30.353,76.622 cw(c30.966,77.235) 30.099,77.235 30.099,78.4 cw(c31.325,78.4) 30.458,79.267 30.607,79.416 cw(c31.22,78.803) 31.22,79.67
S4 on Bottom Layer "NONET_L-01_P-001" (solid, remove dead copper, pour order 7): 44.8,74.758 cw(c44.8,73.532) 45.667,74.399 46.07,73.996 cw(c45.457,73.383) 46.324,73.383 46.324,71.71 cw(c45.711,71.71) 46.144,71.276 45.816,70.948 cw(c45.203,71.561) 45.203,70.694 31.846,70.694 cw(c31.846,71.92) 30.979,71.053 30.322,71.71 cw(c30.935,72.323) 30.068,72.323 30.068,73.488 cw(c31.294,73.488) 30.427,74.355 30.576,74.504 cw(c31.189,73.891) 31.189,74.758
NetD1_4_C on Bottom Layer "NONET_L-01_P-001" (solid, remove dead copper, pour order 6): 45.085,70.272 cw(c45.085,69.046) 45.952,69.913 46.355,69.51 cw(c45.742,68.897) 46.609,68.897 46.609,67.224 cw(c45.996,67.224) 46.429,66.79 46.101,66.462 cw(c45.488,67.075) 45.488,66.208 32.131,66.208 cw(c32.131,67.434) 31.264,66.567 30.607,67.224 cw(c31.22,67.837) 30.353,67.837 30.353,69.002 cw(c31.579,69.002) 30.712,69.869 30.861,70.018 cw(c31.474,69.405) 31.474,70.272
S3 on Bottom Layer "NONET_L-01_P-001" (solid, remove dead copper, pour order 5): 45.15,65.892 cw(c45.15,64.666) 46.017,65.533 46.42,65.13 cw(c45.807,64.517) 46.674,64.517 46.674,62.844 cw(c46.061,62.844) 46.494,62.41 46.166,62.082 cw(c45.553,62.695) 45.553,61.828 32.196,61.828 cw(c32.196,63.054) 31.329,62.187 30.672,62.844 cw(c31.285,63.457) 30.418,63.457 30.418,64.622 cw(c31.644,64.622) 30.777,65.489 30.926,65.638 cw(c31.539,65.025) 31.539,65.892
NetD1_3_C on Bottom Layer "NONET_L-01_P-001" (solid, remove dead copper, pour order 4): 44.45,61.492 cw(c44.45,60.266) 45.317,61.133 45.72,60.73 cw(c45.107,60.117) 45.974,60.117 45.974,58.444 cw(c45.361,58.444) 45.794,58.01 45.466,57.682 cw(c44.853,58.295) 44.853,57.428 31.496,57.428 cw(c31.496,58.654) 30.629,57.787 29.972,58.444 cw(c30.585,59.057) 29.718,59.057 29.718,60.222 cw(c30.944,60.222) 30.077,61.089 30.226,61.238 cw(c30.839,60.625) 30.839,61.492
S2 on Bottom Layer "NONET_L-01_P-001" (solid, remove dead copper, pour order 3): 44.45,56.876 cw(c44.45,55.65) 45.317,56.517 45.72,56.114 cw(c45.107,55.501) 45.974,55.501 45.974,53.828 cw(c45.361,53.828) 45.794,53.395 45.466,53.066 cw(c44.853,53.68) 44.853,52.812 31.496,52.812 cw(c31.496,54.039) 30.629,53.172 29.972,53.828 cw(c30.585,54.442) 29.718,54.442 29.718,55.606 cw(c30.944,55.606) 30.077,56.474 30.226,56.622 cw(c30.839,56.009) 30.839,56.876
NetD1_2_C on Bottom Layer "NONET_L-01_P-001" (solid, remove dead copper, pour order 2): 44.45,52.476 cw(c44.45,51.25) 45.317,52.117 45.72,51.714 cw(c45.107,51.101) 45.974,51.101 45.974,49.428 cw(c45.361,49.428) 45.794,48.995 45.466,48.666 cw(c44.853,49.28) 44.853,48.412 31.496,48.412 cw(c31.496,49.639) 30.629,48.772 29.972,49.428 cw(c30.585,50.042) 29.718,50.042 29.718,51.206 cw(c30.944,51.206) 30.077,52.074 30.226,52.222 cw(c30.839,51.609) 30.839,52.476
S1 on Bottom Layer "NONET_L-01_P-001" (solid, remove dead copper, pour order 1): 44.45,47.834 cw(c44.45,46.608) 45.317,47.475 45.72,47.072 cw(c45.107,46.459) 45.974,46.459 45.974,44.786 cw(c45.361,44.786) 45.794,44.352 45.466,44.024 cw(c44.853,44.637) 44.853,43.77 31.496,43.77 cw(c31.496,44.996) 30.629,44.129 29.972,44.786 cw(c30.585,45.399) 29.718,45.399 29.718,46.564 cw(c30.944,46.564) 30.077,47.431 30.226,47.58 cw(c30.839,46.967) 30.839,47.834
NetD1_1_C on Bottom Layer "NONET_L-01_P-001" (solid, remove dead copper, pour order 0): 44.45,43.434 cw(c44.45,42.208) 45.317,43.075 45.72,42.672 cw(c45.107,42.059) 45.974,42.059 45.974,40.386 cw(c45.361,40.386) 45.794,39.952 45.466,39.624 cw(c44.853,40.237) 44.853,39.37 31.496,39.37 cw(c31.496,40.596) 30.629,39.729 29.972,40.386 cw(c30.585,40.999) 29.718,40.999 29.718,42.164 cw(c30.944,42.164) 30.077,43.031 30.226,43.18 cw(c30.839,42.567) 30.839,43.434
S1 on Top Layer "NONET_L-01_P-001" (solid, remove dead copper, pour order 20): 45.974,48.006 45.974,43.688 31.496,43.688 31.496,48.006
S2 on Top Layer "NONET_L-01_P-001" (solid, remove dead copper, pour order 19): 46.228,56.896 46.228,52.832 30.985,52.832 30.985,56.924
S3 on Top Layer "NONET_L-01_P-001" (solid, remove dead copper, pour order 18): 46.228,65.786 31.242,65.786 31.242,61.976 46.228,61.976
S4 on Top Layer "NONET_L-01_P-001" (solid, remove dead copper, pour order 17): 46.228,74.93 46.228,70.866 31.242,70.866 31.242,74.93
S5 on Top Layer "NONET_L-01_P-001" (solid, remove dead copper, pour order 16): 46.482,84.074 30.988,84.074 30.988,80.264 46.482,80.264
NetD1_6_C on Top Layer "NONET_L-01_P-001" (solid, remove dead copper, pour order 15): 46.482,88.9 31.242,88.9 31.242,84.836 46.482,84.836
S6 on Top Layer "NONET_L-01_P-001" (solid, remove dead copper, pour order 14): 31.242,93.218 46.736,93.218 46.736,89.408 31.242,89.408

## Silkscreen, mask and mechanical layers (free items; w line width, h text height)
Mechanical 2:
  the board outline again, w0.127

## Dimensions
21.082,104.648 to 46.99,104.648 on Mechanical 1